# EAGLE board Arduino Assignment (EAGLE 9.7.0)

Size 168.68 x 82.4 mm. Coordinates in mm from the lower left corner, seen from the top.
Outline: 0,0 168.68,0 168.68,82.4 0,82.4 0,0
Copper layers (1*16): Top 0.035mm / dielectric 1.5mm / Bottom 0.035mm
Design rules "default": minimum track width 6mil, minimum drill 0.35mm, track to track 6mil, track to pad 6mil, pad to pad 6mil, via to via 6mil, smd to smd 6mil, copper to edge 40mil, drill to drill 6mil, minimum pad ring 10mil, minimum via ring 8mil, stop-mask expansion 4mil, vias tented up to drill 0mil, thermal gap 10mil

## Footprints (pad centres in the part's own frame; a part is rotated, then mirrored left to right if it is on the bottom)
LEDRD254W60D565H860B = drill 0.981 pad 1.581: 1 -1.27,0; 2 1.27,0
RESAD1016W63L850D250B = drill 0.83 pad 1.43: 1 -5.08,0; 2 5.08,0
SWITCH-MOMENTARY-PTH-6.5MM = drill 1.016 pad 1.88: 1 -3.251,2.261; 2 3.251,2.261; 3 -3.251,-2.261; 4 3.251,-2.261
ARDUINO-UNO-R3-SHIELD = drill 1.016 pad 1.88: 3.3V 24.13,-2.54; 5V 24.13,0; A0 24.13,12.7; A1 24.13,15.24; A2 24.13,17.78; A3 24.13,20.32; A4 24.13,22.86; A5 24.13,25.4; AREF -24.13,-13.97; D2 -24.13,20.32; D3 -24.13,17.78; D4 -24.13,15.24; D5 -24.13,12.7; D6 -24.13,10.16; D7 -24.13,7.62; D8 -24.13,3.81; D9 -24.13,1.27; D10 -24.13,-1.27; D11 -24.13,-3.81; D12 -24.13,-6.35; D13 -24.13,-8.89; GND@0 24.13,2.54; GND@1 24.13,5.08; GND@2 -24.13,-11.43; IOREF 24.13,-7.62; NC 24.13,-10.16; RES 24.13,-5.08; RX -24.13,25.4; SCL -24.13,-19.05; SDA -24.13,-16.51; TX -24.13,22.86; VIN 24.13,7.62

## Placement (x,y rotation side)
D1  RED  [LEDRD254W60D565H860B]  113.44,30.8 180 top
D2  RED  [LEDRD254W60D565H860B]  113.44,25.72 180 top
D3  RED  [LEDRD254W60D565H860B]  121.06,30.8 180 top
D4  RED  [LEDRD254W60D565H860B]  121.06,25.72 180 top
D5  RED  [LEDRD254W60D565H860B]  128.68,30.8 180 top
D6  RED  [LEDRD254W60D565H860B]  128.68,25.72 180 top
D8  RED  [LEDRD254W60D565H860B]  143.92,46.04 180 top
D9  RED  [LEDRD254W60D565H860B]  151.54,46.04 180 top
D10  RED  [LEDRD254W60D565H860B]  136.3,46.04 180 top
R1  10k  [RESAD1016W63L850D250B]  99.47,18.1 90 top
R2  470  [RESAD1016W63L850D250B]  114.71,38.42 90 top
R3  470  [RESAD1016W63L850D250B]  122.33,38.42 90 top
R4  470  [RESAD1016W63L850D250B]  129.95,38.42 90 top
R5  470  [RESAD1016W63L850D250B]  137.57,38.42 90 top
R6  470  [RESAD1016W63L850D250B]  145.19,38.42 90 top
R7  470  [RESAD1016W63L850D250B]  152.81,38.42 90 top
R10  10k  [RESAD1016W63L850D250B]  157.89,18.1 90 top
S1  SWITCH_MOMENTARY  [SWITCH-MOMENTARY-PTH-6.5MM]  102.01,37.15 90 top
S2  SWITCH_MOMENTARY  [SWITCH-MOMENTARY-PTH-6.5MM]  160.43,37.15 90 top
U3  ARDUINO-UNO-R3-SHIELD  [ARDUINO-UNO-R3-SHIELD]  29.84,34.52 180 top

## Library data of the parts
D1-D6 D8-D10 = Tinkercad; CATEGORY: Opto-Electronic; SUB-CATEGORY: LED; VALUE: LED_RED
R1-R7 R10 S1 S2 U3 = Tinkercad

## Nets
D1_A: D1.1 D2.1 R2.1
D3_A: D3.1 D4.1 R3.1
D5_A: D5.1 D6.1 R4.1
D8_A: D8.1 R6.2
D9_A: D9.1 R7.2
D10_A: D10.1 R5.2
U3_5V: R1.1 R10.1 U3.5V
U3_D2: R7.1 U3.D2
U3_D3: R6.1 U3.D3
U3_D4: R5.1 U3.D4
U3_D5: R4.2 U3.D5
U3_D6: R3.2 U3.D6
U3_D7: R2.2 U3.D7
U3_D11: R10.2 S2.1 S2.2 U3.D11
U3_D12: R1.2 S1.1 S1.2 U3.D12
U3_GND: D1.2 D2.2 D3.2 D4.2 D5.2 D6.2 D8.2 D9.2 D10.2 S1.3 S1.4 S2.3 S2.4 U3.GND@0 U3.GND@1 U3.GND@2

## Tracks (layer width: path | path; a pad name or v marks a point on that pad's centre or on a via)
D1_A  (2 unrouted)
D3_A  (2 unrouted)
D5_A  (2 unrouted)
D8_A  (1 unrouted)
D9_A  (1 unrouted)
D10_A  (1 unrouted)
U3_5V  (2 unrouted)
U3_D2  (1 unrouted)
U3_D3  (1 unrouted)
U3_D4  (1 unrouted)
U3_D5  (1 unrouted)
U3_D6  (1 unrouted)
U3_D7  (1 unrouted)
U3_D11  (3 unrouted)
U3_D12  (3 unrouted)
U3_GND  (15 unrouted)